# EAGLE board board (EAGLE 6.5.0)
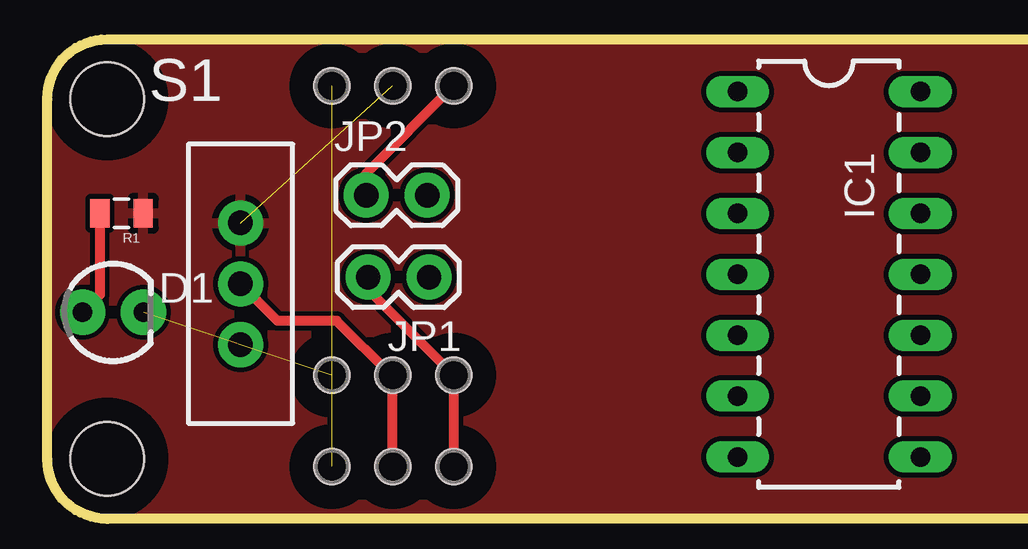
[diagram p0: board, top side]

No outline drawn. Coordinates in mm, seen from the top.
Copper layers (1*16): Top 0.035mm / dielectric 1.5mm / Bottom 0.035mm
Design rules "default": minimum track width 10mil, minimum drill 24mil, track to track 8mil, track to pad 8mil, pad to pad 8mil, via to via 8mil, smd to smd 8mil, copper to edge 40mil, drill to drill 8mil, minimum pad ring 10mil, minimum via ring 8mil, stop-mask expansion 4mil, vias tented up to drill 0mil, thermal gap 10mil
Milling: 8 lines

## Footprints (pad centres in the part's own frame; a part is rotated, then mirrored left to right if it is on the bottom)
LED3MM = drill 0.813 pad 1.88: A -1.27,0; K 1.27,0
1X03_PP_HOLES_ONLY = drill 0.9 pad 0.813: 1 0,0; 2 2.54,0; 3 5.08,0 | hole 1.473: 0,0; 2.54,0; 5.08,0
DIL14 = drill 0.813 long: 1 -8.89,-3.81; 2 -6.35,-3.81; 3 -3.81,-3.81; 4 -1.27,-3.81; 5 1.27,-3.81; 6 3.81,-3.81; 7 6.35,-3.81; 8 6.35,3.81; 9 3.81,3.81; 10 1.27,3.81; 11 -1.27,3.81; 12 -3.81,3.81; 13 -6.35,3.81; 14 -8.89,3.81
1X02 = drill 1.016 pad 1.88: 1 0,0; 2 2.54,0
0805 = smd 0.8 x 1.2: 1 -0.9,0; 2 0.9,0
SWITCH-SPDT = drill 1.016 pad 1.88: 1 0,2.54; 2 0,0; 3 0,-2.54
STAND-OFF-TIGHT = hole 3.048: 0,0

## Placement (x,y rotation side)
D1  [LED3MM]  2.74,8.62 0 top
ESC1  [1X03_PP_HOLES_ONLY]  16.95,2.18 180 top
ESC2  [1X03_PP_HOLES_ONLY]  16.95,5.99 180 top
IC1  [DIL14]  32.59,8.93 270 top
JP1  [1X02]  15.91,10.08 180 top
JP2  [1X02]  13.29,13.49 0 top
R1  [0805]  3.1,12.74 180 top
S1  [SWITCH-SPDT]  8.05,9.8 0 top
SERVO  [1X03_PP_HOLES_ONLY]  16.95,18.05 180 top
U$5  [STAND-OFF-TIGHT]  2.5,17.5 0 top
U$6  [STAND-OFF-TIGHT]  47.5,17.5 0 top
U$7  [STAND-OFF-TIGHT]  2.5,2.5 0 top
U$8  [STAND-OFF-TIGHT]  47.5,2.5 0 top

## Library data of the parts
D1 = SparkFun-LED
ESC1 ESC2 JP1 JP2 SERVO = SparkFun-Connectors
IC1 = SparkFun-AnalogIC
R1 = SparkFun-Passives
S1 = SparkFun-Electromechanical; PROD_ID: SWCH-08261
U$5-U$8 = SparkFun-Electromechanical

## Nets
ESCSIG: ESC1.1 ESC2.1 JP1.2
GND: D1.K ESC1.3 ESC2.3 SERVO.3
N$1: D1.A R1.2
PWRIN: ESC1.2 ESC2.2 S1.2
SERVOSIG: JP2.1 SERVO.1
VCC: R1.1 S1.1 SERVO.2

## Tracks (layer width: path | path; a pad name or v marks a point on that pad's centre or on a via)
ESCSIG
  Top 0.406: ESC1.1 ESC2.1 13.38,9.56 JP1.2
GND  (3 unrouted)
N$1
  Top 0.406: R1.2 2.19,9.34 D1.A
PWRIN
  Top 0.406: ESC1.2 ESC2.2 14.33,5.99 12.06,8.26 9.6,8.26 S1.2
SERVOSIG
  Top 0.406: JP2.1 13.29,14.4 SERVO.1
VCC  (1 unrouted)
  pour Top: 0,20 50,20 50,0 0,0